# Altium PCB solarchicken.PcbDoc
Units mil, origin at the board's own origin, x right, y up, seen from the top; angles counter-clockwise.
Board outline 2500 x 2200 mil, 2 copper layers (Top Layer, Bottom Layer); 43 components, 26 nets, 128 pads, 1 vias.
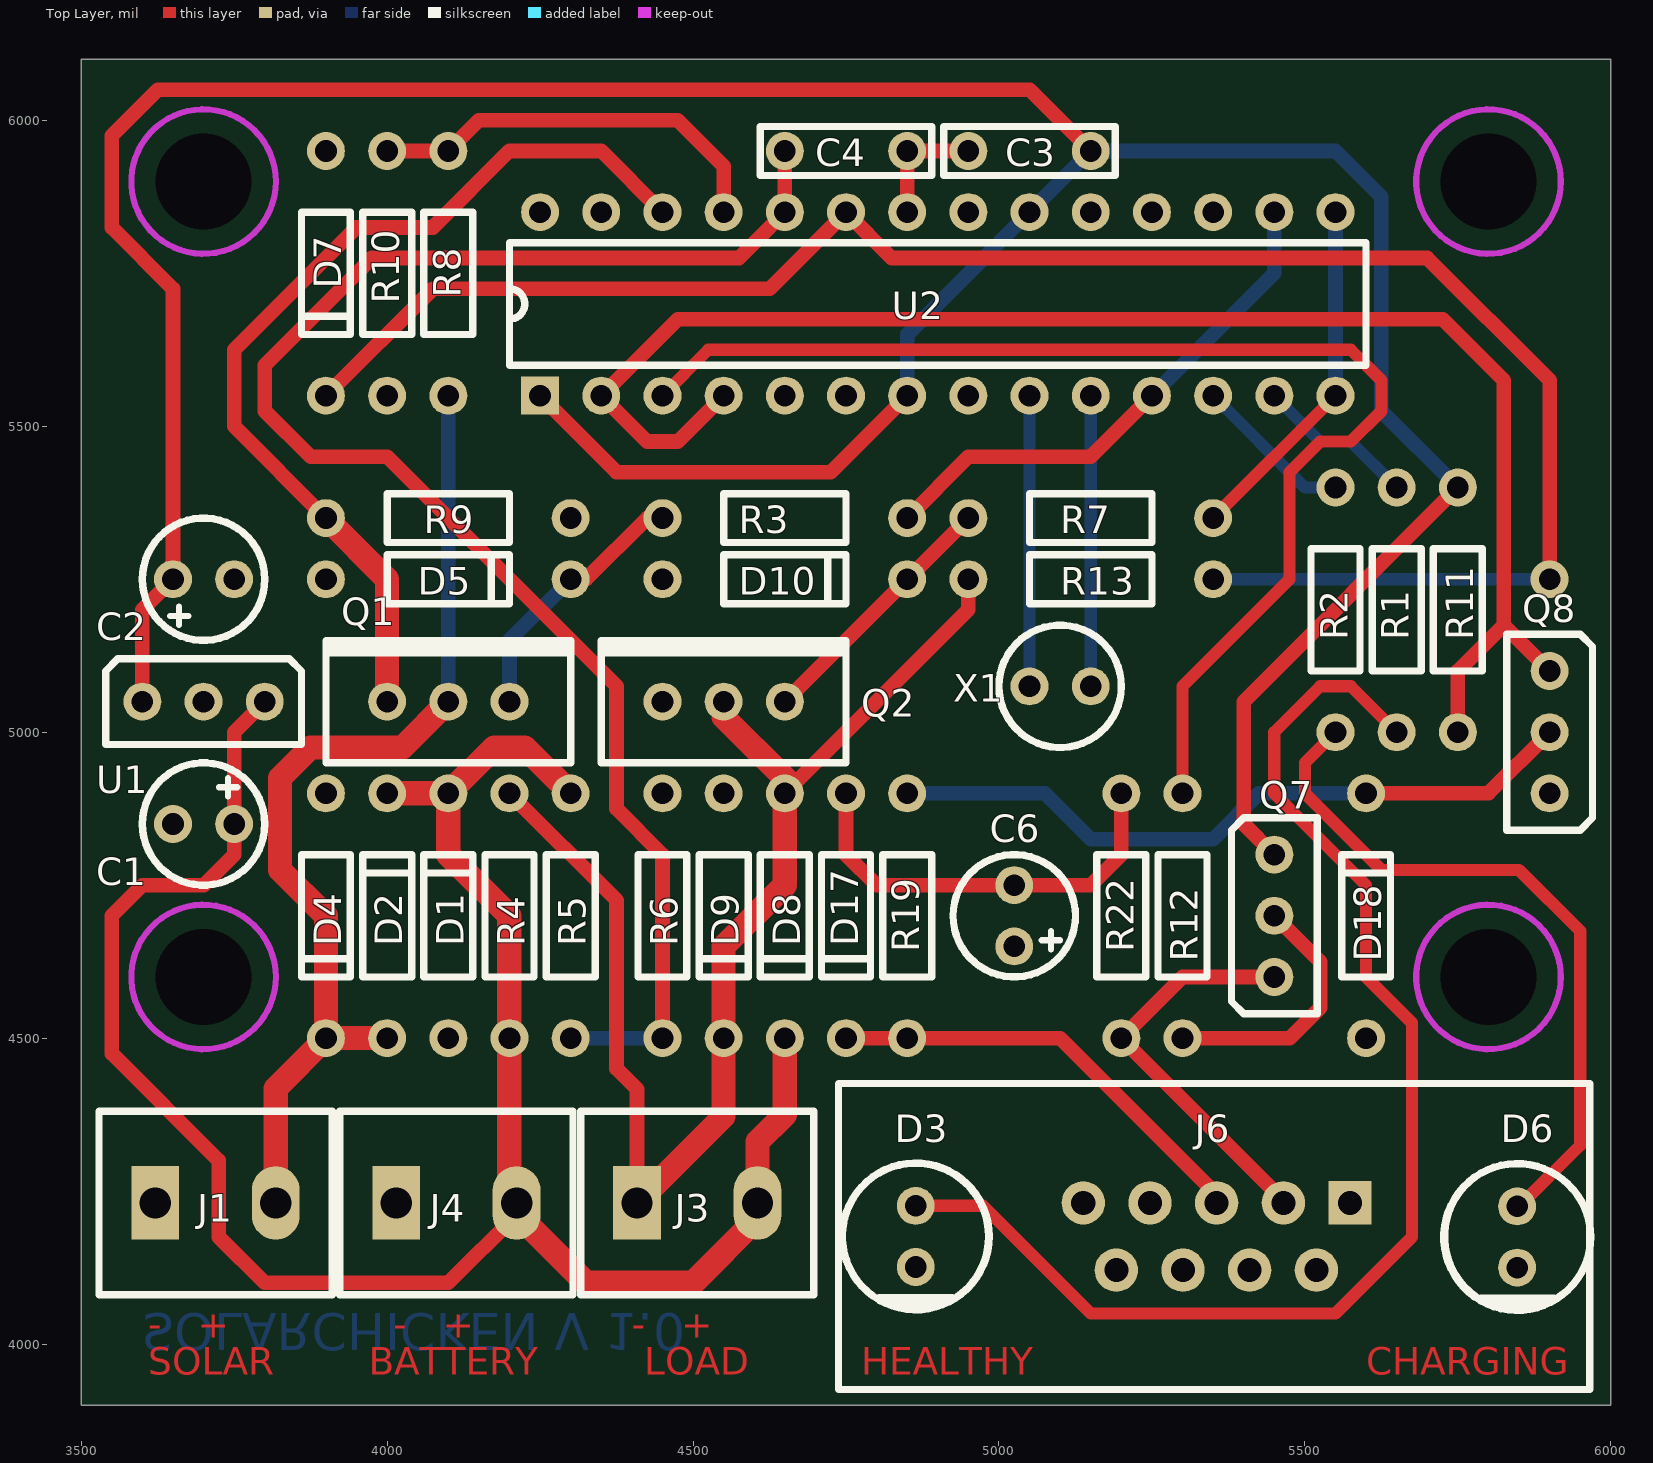
[diagram p0: Top Layer view]
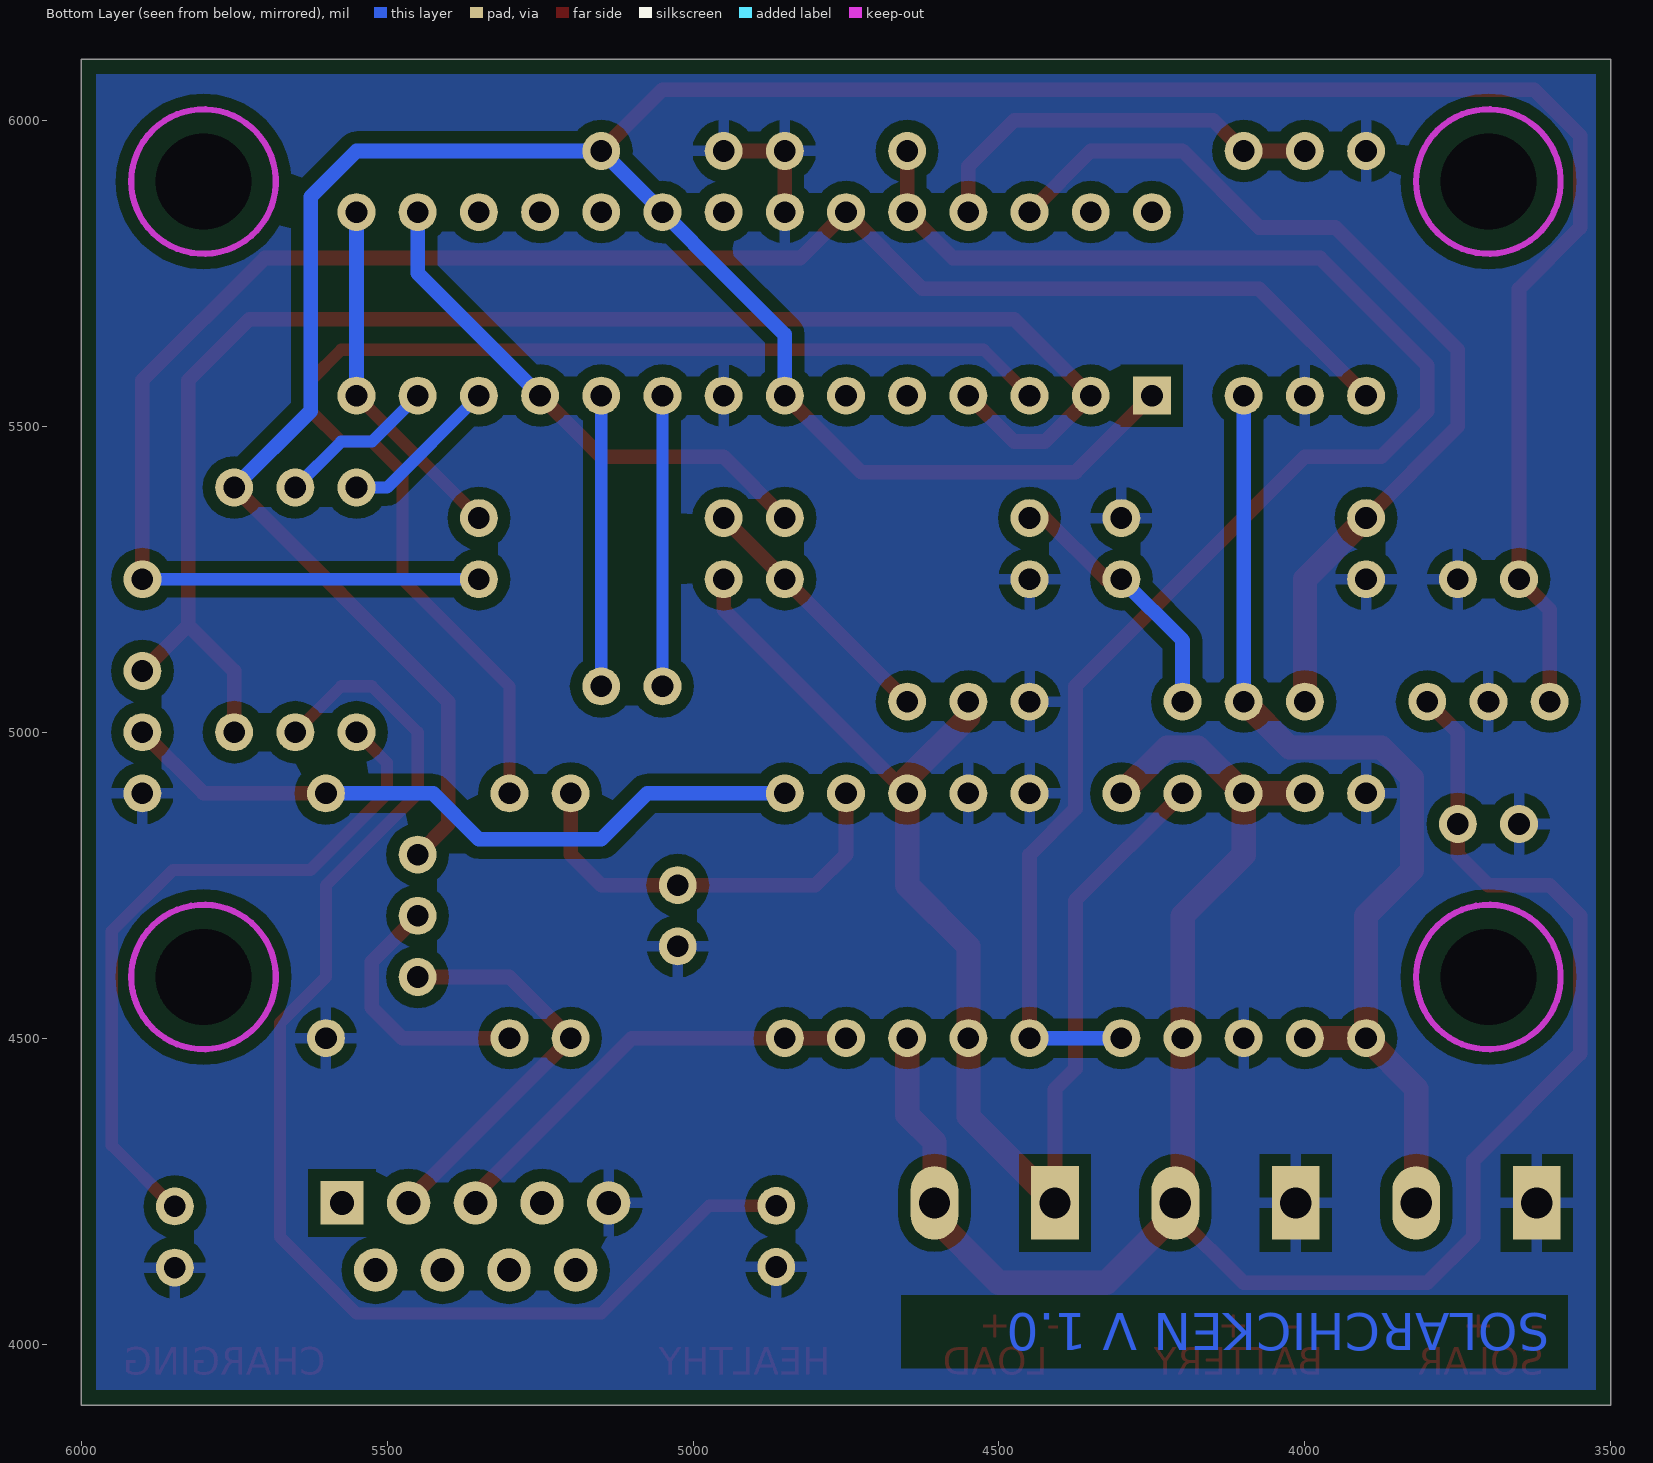
[diagram p1: Bottom Layer view, seen from below]

## Layer stack, top to bottom
Top Layer: signal copper 1.4
Dielectric: dielectric 12.6, FR-4, Dk 4.8
Bottom Layer: signal copper 1.4

## Board outline
3500,3900 6000,3900 6000,6100 3500,6100

## Design rules (kind name [scope] priority, off if disabled: settings)
Clearance poly [InNet('GND') And (OnLayer('Bottom Layer')) And InPoly] p1: gap=19.68
Clearance [OnLayer('Keep-Out Layer')] p2: gap=0
Clearance standard [All] p3: gap=12
ComponentClearance connector [(HasFootprint('MKD500S2'))] p1: gap=0 collisioncheckmode=3 verticalgap=10
ComponentClearance ComponentClearance_1 [All] p2: gap=1 collisioncheckmode=3 verticalgap=10
ComponentClearance [OnLayer('Keep-Out Layer')] p3 off: gap=10 collisioncheckmode=3 verticalgap=10
HoleSize [All] p1: absolutevalues=TRUE maxlimit=196.85 minlimit=10 maxpercent=80.000 minpercent=20.000
PolygonConnect [All] p1: connectstyle=Relief reliefconductorwidth=18 reliefentries=4 polygonreliefangle="90 Angle"
RoomDefinition theswitch [InComponentClass('theswitch')] p1: confinementstyle=ConfineIn formatcopy=TRUE lockcomponents=FALSE outline 3500,3900 6000,3900 6000,6100 3500,6100
RoutingVias [All] p1: holewidth=28 width=50 viastyle="Through Hole" minholewidth=28 minwidth=50 maxholewidth=28 maxwidth=50
SolderMaskExpansion [All] p1: expansion=4
TestPointUsage [All] p1: valid=0 allowmultiple=FALSE
Testpoint [All] p1: side=15 testpointundercomponent=TRUE minsize=40 maxsize=100 preferedsize=60 minholesize=0 maxholesize=40 preferedholesize=32 testpointgrid=1 style=1023 order=0123456789
Width [All] p1: maxlimit=100 minlimit=12 preferedwidth=12 toplayer_prefwidth=24 bottomlayer_prefwidth=24 minimp=50.000000 maximp=50.000000 favimp=50.000000
17 further rules are at their usual default settings.

## Components (designator, comment, footprint, x,y, rotation, side; value= is the part's Value field where it differs from the comment)
C1 "10UF 35V" RADIAL01P 3750,4850 r180 top
C2 "10UF 35V" RADIAL01P 3650,5250 r0 top
C3 "220N 50V" RAD02 5150,5950 r180 top
C4 "220N 50V" RAD02 4650,5950 r0 top
C6 "10UF 35V" RADIAL01P 5025,4650 r90 top
D1 "1N4001" DO35S 4100,4500 r90 top
D2 "1N4001" DO35S 4000,4500 r90 top
D3 "LED" LED3MM 4864,4226 r270 top
D4 "BZX79-30V" DO35S 3900,4900 r270 top
D5 "BZX79-5V6" DO35S 3900,5250 r0 top
D6 "LED" LED3MM 5847,4225 r270 top
D7 "BZX79-2V7" DO35S 3900,5950 r270 top
D8 "1N4001" DO35S 4650,4900 r270 top
D9 "BZX79-30V" DO35S 4550,4900 r270 top
D10 "BZX79-5V6" DO35S 4450,5250 r0 top
D17 "1N4148" DO35S 4750,4900 r270 top
D18 "1N4148" DO35S 5600,4500 r90 top
J1 "SCREW" MKD500S2 3621.1,4230.71 r0 top
J3 "SCREW" MKD500S2 4408.5,4230.71 r0 top
J4 "SCREW" MKD500S2 4014.8,4230.71 r0 top
J6 "DB9" DB9S 5573.76,4230.83 r180 top
Q1 "BD139" TO220V 4000,5050 r0 top
Q2 "BD139" TO220V 4450,5050 r0 top
Q7 "BC558" TO92 5450,4800 r270 top
Q8 "BC548" TO92 5900,4900 r90 top
R1 "4K7" AXIAL04 5650,5400 r270 top
R2 "4K7" AXIAL04 5550,5400 r270 top
R3 "470R" AXIAL04 4450,5350 r0 top
R4 "47K" AXIAL04 4200,4500 r90 top
R5 "120K" AXIAL04 4300,4900 r270 top
R6 "47K" AXIAL04 4450,4500 r90 top
R7 "470R" AXIAL04 4950,5350 r0 top
R8 "220K" AXIAL04 4100,5550 r90 top
R9 "1R" AXIAL04 3900,5350 r0 top
R10 "47K" AXIAL04 4000,5950 r270 top
R11 "4K7" AXIAL04 5750,5000 r90 top
R12 "4K7" AXIAL04 5300,4900 r270 top
R13 "220K" AXIAL04 4950,5250 r0 top
R19 "4K7" AXIAL04 4850,4900 r270 top
R22 "4K7" AXIAL04 5200,4900 r270 top
U1 "LP2950-5V" TO92 3800,5050 r180 top
U2 "ATMEGA8L-8PU" DIP28N 4250,5550 r90 top
X1 "32.768KHz" RADIAL01 5050,5075 r0 top

## Footprints (in the part's own frame and the unit in brackets; to place one, negate y for a bottom-side part, rotate by r counter-clockwise, add the part's x,y. Pads: shape width x height; smd on the part's side, far side on the other; paste and mask are expansions set on the pad)
AXIAL04 [mil]
  round 62 hole 35.43: 1(0,0) 2(400,0)
  silkscreen extent 100,-40 300,40
DB9S [mm]
  rect 1.8x1.8 hole 1: 1(0,0)
  round 1.8 hole 1: 2(2.769,0) 3(5.537,0) 4(8.306,0) 5(11.074,0) 6(1.397,2.794) 7(4.166,2.794) 8(6.934,2.794) 9(9.703,2.794)
  silkscreen extent -9.98,-4.95 21.23,7.75
DIP28N [mil]
  rect 62x62 hole 35.43: 1(0,0)
  round 62 hole 35.43: 2(0,-100) 3(0,-200) 4(0,-300) 5(0,-400) 6(0,-500) 7(0,-600) 8(0,-700) 9(0,-800) 10(0,-900) 11(0,-1000) 12(0,-1100) 13(0,-1200) 14(0,-1300) 15(300,-1300) 16(300,-1200) 17(300,-1100) 18(300,-1000) 19(300,-900) 20(300,-800) 21(300,-700) 22(300,-600) 23(300,-500) 24(300,-400) 25(300,-300) 26(300,-200) 27(300,-100) 28(300,0)
  silkscreen extent 50,-1350 250,50
DO35S [mil]
  round 62 hole 35.43: 1(0,0) 2(400,0)
  silkscreen extent 100,-40 300,40
LED3MM [mil]
  round 62 hole 35.43: 1(0,0) 2(100,0)
  silkscreen extent -70,-120 170,120
MKD500S2 [mil]
  rect 78x120 hole 51.18: 1(0,0)
  oval 78x120 hole 51.18: 2(196.85,0)
  silkscreen extent -92,-150 289,150
RAD02 [mil]
  round 62 hole 35.43: 1(0,0) 2(200,0)
  silkscreen extent -40,-40 240,40
RADIAL01 [mil]
  round 62 hole 35.43: 1(0,0) 2(100,0)
  silkscreen extent -50,-100 150,100
RADIAL01P [mil]
  round 62 hole 35.43: 1(0,0) 2(100,0)
  silkscreen extent -50,-100 150,100
TO92 [mil]
  round 62 hole 35.43: 1(0,0) 2(100,0) 3(200,0)
  silkscreen extent -60,-70 260,70
TO220V [mil]
  round 62 hole 35.43: 1(0,0) 2(100,0) 3(200,0)
  silkscreen extent -100,-100 300,100

## Part data
C1 C2 C6: library part CAPPOL, "CAPACITOR ELECTROLYTIC"
C3 C4: library part CAPACITOR, "CAPACITOR"
D4 D5 D7 D9 D10: library part BZX79, "ZENER DIODE"
D17 D18: library part 1N4001
J1 J3 J4: library part CON2, "CONNECTOR"
J6: "CONNECTOR"
R1 R2 R3 R4 R5 R6 R7 R8 R9 R10 R11 R12 R13 R19 R22: library part RES, "RESISTOR"
U1: library part LP2950, "LP2950"
U2: "MICROCONTROLLER"
X1: library part XTAL, "CRYSTAL"

## Free pads (board coordinates)
  round 0 hole 157.48 unplated: 0(3700,4600) 0(3700,5900) 0(5800,4600) 0(5800,5900)

## Via types
v1: diameter 62, hole 35.43, Top Layer to Bottom Layer, 1 vias

## Nets (pads, with @x,y where several pads share a name; then routed paths per layer and width w, separated by ;. In a path a pad name is that pad's centre, name@x,y a point inside that pad or via, vN(x,y) a via of type N, cw(c..) or ccw(c..) an arc to the next point about the centre after c; other vN are vias at no path point)
5V: C2.1 C3.1 Q7.1 R11.2 U1.3 U2.1 U2.7 U2.20 | length 5686
  Top Layer w24: U1.3 3600,5200 C2.1 3650,5725 3550,5825 3550,5975 3625,6050 5050,6050 C3.1 ; U2.1 4375,5425 4725,5425 U2.7 ; Q7.1 5400,4850 5400,5050 R11.2
  Bottom Layer w24: U2.7 4850,5650 C3.1 5550,5950 5625,5875 5625,5525 R11.2
GND: C1.2 C2.2 C3.2 C4.2 C6.1 D1.1 D3.2 D4.1 D5.1 D6.2 D7.1 D9.1 D10.1 D18.1 J1.1 J4.1 J6.5 Q2.1 Q8.1 R6.2 R9.2 R10.2 U1.2 U2.8 U2.22 | length 200
  Top Layer w24: U2.22 C4.2 C3.2
NetC4_1: C4.1 R5.2 R6.1 U2.24 | length 2646
  Top Layer w24: R6.1 4450,4800 4375,4875 4375,5075 4000,5450 3875,5450 3800,5525 3800,5600 3975,5775 4575,5775 U2.24 C4.1
  Bottom Layer w24: R5.2 R6.1
NetC6_2: C6.2 D17.1 R22.1 | length 691.4
  Top Layer w24: D17.1 4750,4800 4800,4750 5150,4750 5200,4800 R22.1
NetD2_1: D2.1 D4.2 J1.2 Q1.2 R8.1 | length 1686.1
  Top Layer w39.37: J1.2 3817.95,4417.95 D4.2 ; D2.1 D4.2 ; Q1.2 4025,4975 3875,4975 3825,4925 3825,4775 3900,4700 D4.2
  Bottom Layer w24: Q1.2 R8.1
NetD3_1: D3.1 R1.2 | length 2116
  Top Layer w20: D3.1 4974,4226 5150,4050 5550,4050 5675,4175 5675,4525 5600,4600 5600,4750 5450,4900 5450,5000 5525,5075 5575,5075 R1.2
NetD5_2: D5.2 Q1.3 R3.1 | length 432.8
  Top Layer w24: D5.2 4325,5250 4425,5350 R3.1
  Bottom Layer w24: Q1.3 4200,5150 D5.2
NetD6_1: D6.1 R2.2 | length 1158.3
  Top Layer w20: R2.2 5500,4950 5500,4900 5625,4775 5850,4775 5950,4675 5950,4325 5850,4225 D6.1
NetD7_2: D7.2 R13.2 U2.23 | length 3113.2
  Top Layer w24: D7.2 4075,5725 4625,5725 U2.23 4825,5775 5700,5775 5900,5575 v1(5900,5250)
  Bottom Layer w19.68: R13.2 v1(5900,5250)
NetD8_1: D8.1 D9.2 J3.1 Q2.2 R4.2 R13.1 | length 2190.7
  Top Layer w24: R4.2 4375,4725 4375,4450 4408.5,4416.5 J3.1 ; D8.1 4950,5200 R13.1
  Top Layer w39.37: J3.1 4550,4372.2 4550,4650 4650,4750 ; Q2.2 4550,5025 D8.1@4650,4925
  Top Layer w40: 4650,4750 D8.1@4650,4925
NetD10_2: D10.2 Q2.3 R7.1 | length 424.3
  Top Layer w24: Q2.3 R7.1
NetD17_2: D17.2 J6.3 R19.2 | length 736.7
  Top Layer w19.68: J6.3@5344.17,4230.83 J6.3
  Top Layer w24: D17.2 5100,4500 5355.76,4244.24 J6.3
NetD18_2: D18.2 Q8.2 R19.1 | length 1153.6
  Top Layer w24: D18.2 5800,4900 Q8.2
  Bottom Layer w24: R19.1 5075,4900 5150,4825 5350,4825 5425,4900 D18.2
NetJ6_2: J6.2 Q7.3 R22.2 | length 665.9
  Top Layer w24: Q7.3 5300,4600 R22.2 J6.2@5464.76,4235.24
NetQ1_1: Q1.1 R9.1 U2.26 | length 1554.6
  Top Layer w24: R9.1 3750,5500 3750,5625 3950,5825 4075,5825 4200,5950 4350,5950 U2.26
  Top Layer w39.37: R9.1 4000,5250 Q1.1
NetQ7_2: Q7.2 R12.2 | length 426.8
  Top Layer w24: R12.2 5475,4500 5525,4550 5525,4625 Q7.2
NetQ8_3: Q8.3 R11.1 U2.2 U2.4 | length 2542.5
  Top Layer w24: U2.4 4475,5475 4425,5475 U2.2 4475,5675 5725,5675 5825,5575 5825,5175 ; R11.1 5750,5100 5825,5175 ; Q8.3 5825,5175
NetR1_1: R1.1 U2.13 | length 262.1
  Bottom Layer w19.68: U2.13 5525,5475 5575,5475 R1.1
NetR2_1: R2.1 U2.12 | length 262.1
  Bottom Layer w19.68: U2.12 5500,5400 R2.1
NetR3_2: R3.2 U2.11 U2.16 | length 865.7
  Top Layer w24: R3.2 4950,5450 5150,5450 U2.11
  Bottom Layer w24: U2.11 5450,5750 U2.16
NetR7_2: R7.2 U2.14 U2.15 | length 582.8
  Top Layer w20: R7.2 U2.14
  Bottom Layer w24: U2.14 U2.15
NetR8_2: R8.2 R10.1 U2.25 | length 676.8
  Top Layer w24: R10.1 R8.2 4150,6000 4475,6000 4550,5925 U2.25
NetR12_1: R12.1 U2.3 | length 2065.7
  Top Layer w20: U2.3 4525,5625 5575,5625 5625,5575 5625,5525 5575,5475 5525,5475 5475,5425 5475,5250 5300,5075 R12.1
NetU2_9: U2.9 X1.1 | length 475
  Bottom Layer w19.68: X1.1 U2.9
NetU2_10: U2.10 X1.2 | length 475
  Bottom Layer w19.68: X1.2 U2.10
VBAT: C1.1 D1.2 D2.2 D8.2 J3.2 J4.2 R4.1 R5.1 U1.1 | length 3567.7
  Top Layer w24: U1.1 3750,5000 3750,4800 3700,4750 3600,4750 3550,4700 3550,4475 3725,4300 3725,4175 3800,4100 4100,4100 J4.2@4211.65,4211.65
  Top Layer w40: D2.2 D1.2 ; J4.2@4211.65,4211.65 4211.65,4238.35 4200,4250 4200,4700 4100,4800 D1.2 ; J4.2@4211.65,4213.35 4325,4100 4500,4100 4605.35,4205.35 4605.35,4330.35 4650,4375 D8.2 ; R5.1 4225,4975 4175,4975 D1.2
pads on no net: J6.1 J6.4 J6.6 J6.7 J6.8 J6.9 U2.5 U2.6 U2.17 U2.18 U2.19 U2.21 U2.27 U2.28

## Polygon pours and split planes (outlines as drawn)
GND on Bottom Layer "Top Layer-No Net" (solid, remove dead copper, pour order 1000): 3525,6075 5975,6075 5975,3925 3525,3925

## Keep-outs
Keep-Out Layer:
  circle w10: c3700,4600 r118.11
  circle w10: c5800,5900 r118.11
  circle w10: c3700,5900 r118.11
  circle w10: c5800,4600 r118.11

## Other copper
Top Layer:
  text "-   +" at 3610,4010 h45
  text "-   +" at 4010,4010 h45
  text "-   +" at 4400,4010 h45
  text "SOLAR" at 3610,3950 h45
  text "BATTERY" at 3970,3950 h45
  text "LOAD" at 4420,3950 h45
  text "HEALTHY" at 4775,3950 h45
  text "CHARGING" at 5600,3950 h45
Bottom Layer:
  text "SOLARCHICKEN V 1.0" at 3600,4050 h60 r180

## Silkscreen, mask and mechanical layers (free items; w line width, h text height)
Mechanical 1:
  the board outline again, w10